# Altium PCB PCB_ModuloIndividualPlaza.PcbDoc
Units mil, origin at the board's own origin, x right, y up, seen from the top; angles counter-clockwise.
Board outline 6000 x 4000 mil, 2 copper layers (Top Layer, Bottom Layer); 76 components, 89 nets, 279 pads, 0 vias.
Unrouted connection lines stored in the file: 158.
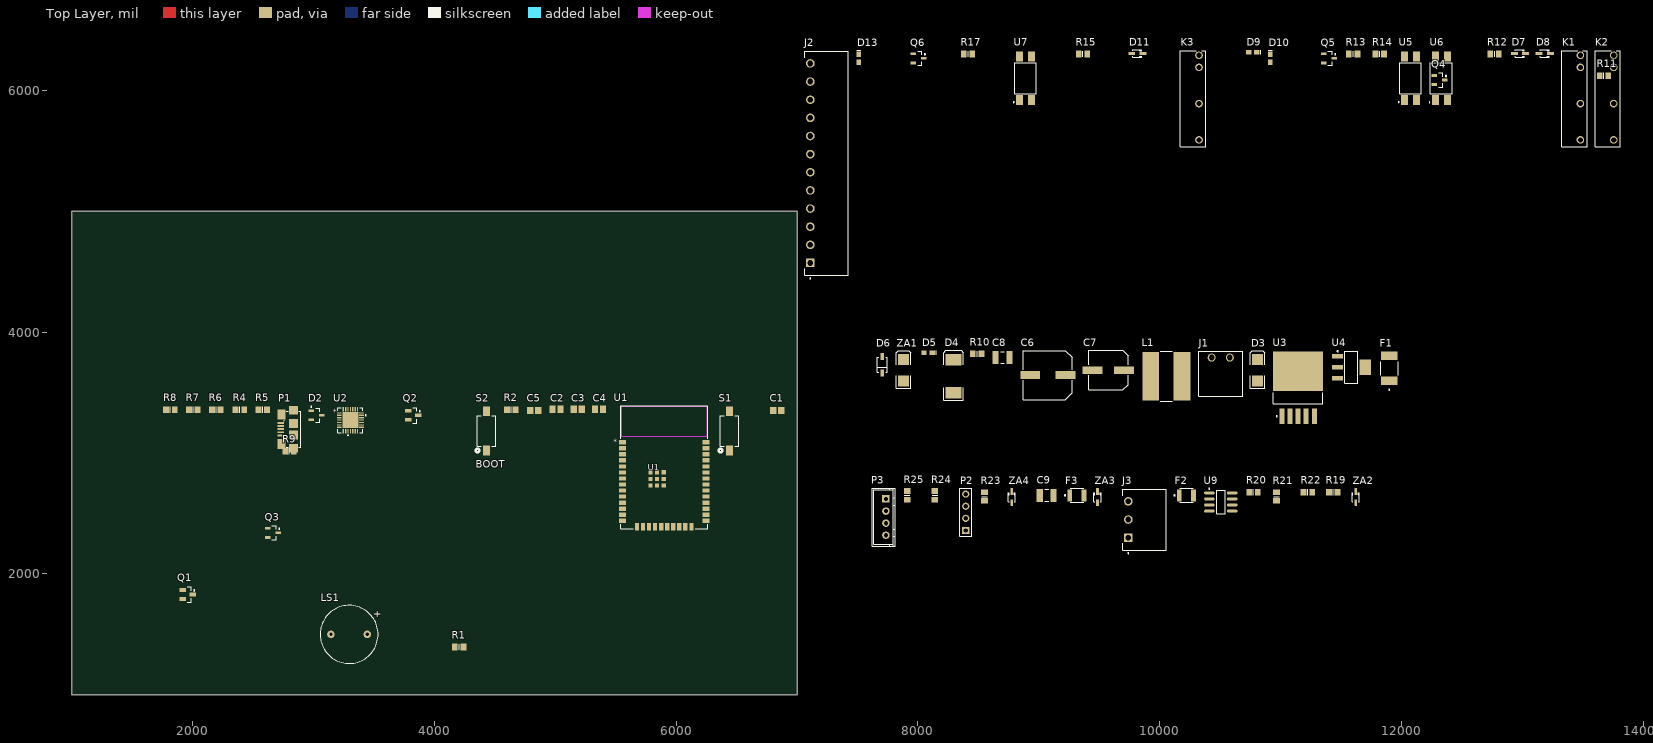
[diagram p0: Top Layer view]
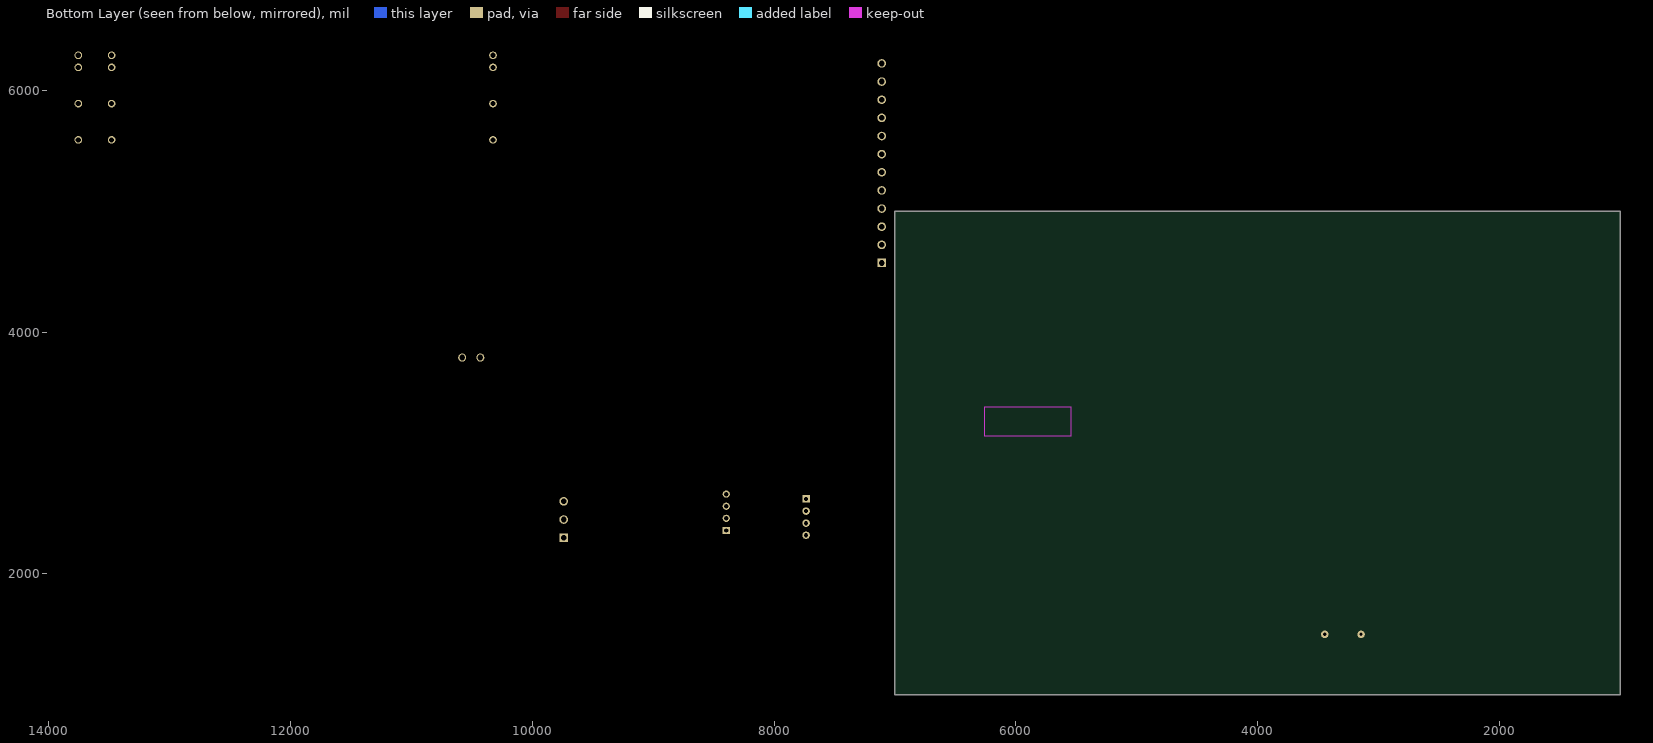
[diagram p1: Bottom Layer view, seen from below]

## Layer stack, top to bottom
Top Solder: solder mask 0.4, Solder Resist, Dk 3.5
Top Layer: signal copper 1.4
Dielectric 1: dielectric 12.6, FR-4, Dk 4.8
Bottom Layer: signal copper 1.4
Bottom Solder: solder mask 0.4, Solder Resist, Dk 3.5

## Board outline
1000,1000 7000,1000 7000,5000 1000,5000

## Design rules (kind name [scope] priority, off if disabled: settings)
Clearance [All] p1: gap=10
PolygonConnect [All] p1: connectstyle=Relief reliefconductorwidth=10 reliefentries=4 polygonreliefangle="90 Angle" airgapwidth=10
RoomDefinition "Salidas con relé" [InComponentClass('Salidas con relé')] p1: confinementstyle=ConfineIn formatcopy=TRUE lockcomponents=FALSE outline 7045,4430 13825,4430 13825,6445 7045,6445
RoomDefinition MainBoard [InComponentClass('MainBoard')] p2: confinementstyle=ConfineIn formatcopy=TRUE lockcomponents=FALSE outline 2660,125 7650,125 7650,1850 2660,1850
RoomDefinition Fuentes [InComponentClass('Fuentes')] p3: confinementstyle=ConfineIn formatcopy=TRUE lockcomponents=FALSE outline 7639.92,3220 11989.92,3220 11989.92,3960 7639.92,3960
RoomDefinition ESP32-WROOM-32E [InComponentClass('ESP32-WROOM-32E')] p4: confinementstyle=ConfineIn formatcopy=TRUE lockcomponents=FALSE outline 1736.26,2342.4 6916.26,2342.4 6916.26,4947.4 1736.26,4947.4
RoomDefinition Comunicaciones [InComponentClass('Comunicaciones')] p5: confinementstyle=ConfineIn formatcopy=TRUE lockcomponents=FALSE outline 7595.51,2155 11775.51,2155 11775.51,2820 7595.51,2820
RoutingVias [All] p1: holewidth=28 width=50 viastyle="Through Hole" minholewidth=28 minwidth=50 maxholewidth=28 maxwidth=50
SolderMaskExpansion [All] p1: expansion=4
Width [All] p1: maxlimit=10 minlimit=10 preferedwidth=10
30 further rules are at their usual default settings.

## Classes and differential pairs
component class Comunicaciones: C9 F2 F3 J3 P2 P3 R19 R20 R21 R22 R23 R24 R25 U9 ZA2 ZA3 ZA4
component class ESP32-WROOM-32E: C1 C2 C3 C4 C5 D2 P1 Q2 Q4 R2 R4 R5 R6 R7 R8 R9 S1 S2 U1 U2
component class Fuentes: C6 C7 C8 D3 D4 D5 D6 F1 J1 L1 R11 U3 U4 ZA1
component class MainBoard: LS1 Q4 R11
component class "Salidas con relé": D7 D8 D9 D10 D11 D13 J2 K1 K2 K3 Q4 Q5 R11 R12 R13 R14 U5 U6 U7

## Components (designator, comment, footprint, x,y, rotation, side; value= is the part's Value field where it differs from the comment)
C1 "100nF" CAPC2012N 6836.26,3352.4 r0 top
C2 "0.1uF" CAPC2012N 5011.26,3362.4 r0 top
C3 "0.1uF" CAPC2012N 5186.26,3362.4 r0 top
C4 "22uF" CAPC2012N 5361.26,3362.4 r0 top
C5 "100nF" CAPC2012N 4826.26,3352.4 r0 top
C6 "470uF" CapElecSMD_10mm 9074.92,3645 r0 top
C7 "330uF" CapElecSMD_8mm 9574.92,3685 r0 top
C8 "10uF" CAPC3225N 8699.92,3790 r0 top
C9 "1uF" CAPC3225N 9065.51,2650 r0 top
D2 "Diode BAT17" SOT-23_N 3026.26,3312.4 r0 top
D3 "RS3JB-13-F" SMB 10809.92,3685 r90 top
D4 "B540C-13-F" SMC 8294.92,3635 r90 top
D5 "APT1608CGCK" CD1608-0603 8084.92,3830 r0 top
D6 "MMSZ5V6T1G" SOD-123_ONS-M 7704.92,3730 r90 top
D7 "1N4448WS" SOD-323 12980,6305 r0 top
D8 "1N4448WS" SOD-323 13185,6305 r0 top
D9 "APT1608CGCK" CD1608-0603 10770,6315 r0 top
D10 "APT1608CGCK" CD1608-0603 10915,6265 r90 top
D11 "1N4448WS" SOD-323 9815,6305 r0 top
D13 "APT1608CGCK" CD1608-0603 7510,6265 r90 top
F1 "PTS18126V300" FUSE_PTS18126_COB 11899.92,3700 r90 top
F2 "MF-USMF050-2" MF-USMF050-2 10220.51,2650 r0 top
F3 "MF-USMF050-2" MF-USMF050-2 9315.51,2650 r0 top
J1 "Bornera_3.81mm_x2" CONN_5444262_PXC 10579.92,3790 r0 top
J2 "Bornera 3.81mm_90º_V_x12" PHOENIX_1803374 7425,4470 r90 top
J3 "Bornera_3.81mm_90_V_x3" Bornera_3.81mm_90_V_x3 9740.51,2300 r90 top
K1 "G6DN-1A DC5" RELAY_G6DN-1A_OMR 13480,6290 r0 top
K2 "G6DN-1A DC5" RELAY_G6DN-1A_OMR 13755,6290 r0 top
K3 "G6DN-1A DC5" RELAY_G6DN-1A_OMR 10325,6290 r0 top
L1 "47uH" INDUCTOR_47UH_3A 10054.92,3635 r0 top
LS1 "Buzzer" BUZZER 3445,1500 r0 top
P1 "Header 5" ZX62-B-5PA(33) 2731.26,3197.4 r90 top
P2 "OLED_STM" HDR1X4 8395.51,2360 r90 top
P3 "CON1X4" CON1X4 7735.51,2320 r90 top
Q1 "S8050 (NPN)" S8050 1960,1830 r0 top
Q2 "S8050 (NPN)" S8050 3826.26,3312.4 r0 top
Q3 "MMBT3904" SOT23_N 2665,2340 r0 top
Q4 "MMBT3904" SOT23_N 12315.08,6085 r0 top
Q5 "MMBT3904" SOT23_N 11400,6265 r0 top
Q6 "MMBT3904" SOT23_N 8005,6265 r0 top
R1 "10MΩ" RESC2012N 4205,1395 r0 top
R2 "10MΩ" RESC2012N 4636.26,3357.4 r0 top
R4 "2KΩ" RESC2012N 2391.26,3357.4 r0 top
R5 "2KΩ" RESC2012N 2581.26,3357.4 r0 top
R6 "22.1KΩ" RESC2012N 2196.26,3357.4 r0 top
R7 "2KΩ" RESC2012N 2006.26,3357.4 r0 top
R8 "47.5KΩ" RESC2012N 1816.26,3357.4 r0 top
R9 "1k" RESC2012N 2801.18,3015 r0 top
R10 "1k" RESC2012N 8489.92,3820 r0 top
R11 "1k" RESC2012N 13675.08,6120 r0 top
R12 "1k" RESC2012N 12770,6300 r0 top
R13 "470" RESC2012N 11600,6300 r0 top
R14 "470" RESC2012N 11820,6300 r0 top
R15 "1k" RESC2012N 9365,6300 r0 top
R17 "470" RESC2012N 8415,6300 r0 top
R19 "100K" RESC2012N 11435.51,2675 r0 top
R20 "10K" RESC2012N 10775.51,2675 r0 top
R21 "10K" RESC2012N 10965.51,2640 r90 top
R22 "10K" RESC2012N 11225.51,2675 r0 top
R23 "100K" RESC2012N 8550.51,2640 r90 top
R24 "4.7k" RESC2012N 8140.51,2650 r90 top
R25 "4.7k" RESC2012N 7910.51,2650 r90 top
S1 "RESET" "SWITCH TACTILE SPST-NO 0.05A 12V" 6441.26,3182.4 r90 top
S2 "BOOT" "SWITCH TACTILE SPST-NO 0.05A 12V" 4431.26,3182.4 r90 top
U1 "ESP32-WROOM-32E" ESP32-WROOM-32E 5901.26,2882.4 r0 top
U2 "CP2102" CP2102 3306.26,3272.4 r0 top
U3 "LM2596S-5.0" TS5B_N 11144.92,3540 r90 top
U4 "TLV1117LV33" SOT223 11584.92,3710 r0 top
U5 "FOD817CSD" "OPTOISOLATOR 5KV TRANSISTOR 4SMD" 12075,6100 r90 top
U6 "FOD817CSD" "OPTOISOLATOR 5KV TRANSISTOR 4SMD" 12330,6100 r90 top
U7 "FOD817CSD" "OPTOISOLATOR 5KV TRANSISTOR 4SMD" 8890,6100 r90 top
U9 "MAX485CSA+T" M08A_N 10505.51,2595 r0 top
ZA1 "P6SMB33CA" SMB 7879.92,3685 r90 top
ZA2 "SD12C-7" SOD-323 11620.51,2635 r90 top
ZA3 "SD12C-7" SOD-323 9485.51,2635 r90 top
ZA4 "SD12C-7" SOD-323 8775.51,2635 r90 top

## Footprints (in the part's own frame and the unit in brackets; to place one, negate y for a bottom-side part, rotate by r counter-clockwise, add the part's x,y. Pads: shape width x height; smd on the part's side, far side on the other; paste and mask are expansions set on the pad)
Bornera_3.81mm_90_V_x3 [mm]
  rect 1.8x1.8 / inner round 1.8 / far side rect 1.8x1.8 hole 1.2: 1(0,0)
  round 1.8 hole 1.2: 2(3.81,0) 3(7.62,0)
  silkscreen extent -3.35,-8 10.22,1.2, body extent -2.61,-8.15 10.21,1.05, height 7.25
BUZZER [mil]
  round 62 hole 28: 1(0,0) 2(-300,0)
  silkscreen extent -390,-240 90,240
CAPC2012N [mm] "Chip Capacitor, Body 2.0x1.3mm, IPC Medium Density"
  rect 1.3x1.5 smd: 1(-0.85,0) 2(0.85,0)
  body extent -1.1,-0.72 1.1,0.72, height 1.1
CAPC3225N [mm] "Chip Capacitor, Body 3.2x2.5mm, IPC Medium Density"
  rect 1.3x2.7 smd: 1(-1.45,0) 2(1.45,0)
  silkscreen extent -0.4,-1.25 0.4,1.25, body extent -1.7,-1.35 1.7,1.35, height 1.35
CapElecSMD_8mm [mm]
  rect 4.2x1.6 smd: 1(3.3,0) 2(-3.3,0)
  silkscreen extent -4.15,-4.15 4.15,4.15, body extent -4.88,-4.12 4.82,4.17, height 10.2
CapElecSMD_10mm [mm]
  rect 4.2x1.6 smd: 1(3.7,0) 2(-3.7,0)
  silkscreen extent -5.15,-5.15 5.15,5.15, body extent -5.4,-5.07 5.6,5.23, height 11.52
CD1608-0603 [mm] "Chip Diode; Body 1.6 x 0.8 mm (LxW typ)"
  rect 1.1x1 smd: 1(-0.85,0) 2(0.85,0)
  silkscreen extent 1.7,-0.4 1.7,0.4
CON1X4 [mil] "Connector; Header; 4 Position"
  rect 62x62 hole 35.43: 1(300,0)
  round 62 hole 35.43: 2(200,0) 3(100,0) 4(0,0)
  silkscreen extent -90,-75 390,115, body extent -95,-93 393,134, height 276
CONN_5444262_PXC [mil]
  round 67 / inner round 60 / far side round 67 hole 47 paste-33.5 mask+0: 1(0,0) 2(-150,0)
  silkscreen extent -258,-320 108,52
CP2102 [mm] "IC USB-TO-UART BRIDGE Interfaz 28-QFN (5x5)"
  rect 0.96x0.255 smd paste+0 mask+0: 1(-2.322,1.5) 2(-2.322,1) 3(-2.322,0.5) 4(-2.322,0) 5(-2.322,-0.5) 6(-2.322,-1) 7(-2.322,-1.5) 15(2.322,-1.5) 16(2.322,-1) 17(2.322,-0.5) 18(2.322,0) 19(2.322,0.5) 20(2.322,1) 21(2.322,1.5)
  rect 0.255x0.96 smd paste+0 mask+0: 8(-1.5,-2.322) 9(-1,-2.322) 10(-0.5,-2.322) 11(0,-2.322) 12(0.5,-2.322) 13(1,-2.322) 14(1.5,-2.322) 22(1.5,2.322) 23(1,2.322) 24(0.5,2.322) 25(0,2.322) 26(-0.5,2.322) 27(-1,2.322) 28(-1.5,2.322)
  rect 3.353x3.353 smd paste-1.676 mask+0: 29(0,0)
  silkscreen extent -2.63,-3.31 3.31,2.63, body extent -2.5,-2.5 2.5,2.5, height 0.99
ESP32-WROOM-32E [mil] "ESP32-WROOM-32E con antena integrada."
  rect 59x35 smd paste+0 mask+0: 1(-344.5,207.1) 2(-344.5,157.1) 3(-344.5,107.1) 4(-344.5,57.1) 5(-344.5,7.1) 6(-344.5,-42.9) 7(-344.5,-92.9) 8(-344.5,-142.9) 9(-344.5,-192.9) 10(-344.5,-242.9) 11(-344.5,-292.9) 12(-344.5,-342.9) 13(-344.5,-392.9) 14(-344.5,-442.9) 25(344.5,-442.9) 26(344.5,-392.9) 27(344.5,-342.9) 28(344.5,-292.9) 29(344.5,-242.9) 30(344.5,-192.9) 31(344.5,-142.9) 32(344.5,-92.9) 33(344.5,-42.9) 34(344.5,7.1) 35(344.5,57.1) 36(344.5,107.1) 37(344.5,157.1) 38(344.5,207.1)
  rect 35x59 smd paste+0 mask+0: 15(-225,-492.15) 16(-175,-492.15) 17(-125,-492.15) 18(-75,-492.15) 19(-25,-492.15) 20(25,-492.15) 21(75,-492.15) 22(125,-492.15) 23(175,-492.15) 24(225,-492.15)
  rect 35x35 smd paste+0 mask+0: 39(-59.1,-96.9) 40(-114.2,-41.8) 41(-114.2,-96.9) 42(-114.2,-152) 43(-59.1,-152) 44(-4,-152) 45(-4,-96.9) 46(-4,-41.8) 47(-59.1,-41.8)
  Keep-Out Layer region: 354.5,258 354.5,502 -354.5,502 -354.5,258
  silkscreen extent -360,-507 360,507, body extent -354,-502 355,502, height 128
FUSE_PTS18126_COB [mil]
  rect 70x138 smd paste+0 mask+0: 1(-102.95,0) 2(102.95,0)
  silkscreen extent -182,-72 55,72, body extent -84,-69 84,69, height 47
HDR1X4 [mm] "Connector; Header; 4 Position"
  rect 1.5x1.5 hole 0.9: 1(0,0)
  round 1.5 hole 0.9: 2(2.54,0) 3(5.08,0) 4(7.62,0)
  silkscreen extent -1.27,-1.27 8.89,1.27
INDUCTOR_47UH_3A [mil] "CIAA_NXP"
  rect 138x402 smd paste+0 mask+0: 1(-130,0) 2(130,0)
  silkscreen extent -50,-208 50,208, body extent -193,-196 193,198, height 236
M08A_N [mm] "SOIC, 8-Leads, Body 4.9x3.9mm, Pitch 1.27mm, IPC Medium Density"
  oval 2.2x0.6 smd: 1(-2.4,1.905) 2(-2.4,0.635) 3(-2.4,-0.635) 4(-2.4,-1.905) 5(2.4,-1.905) 6(2.4,-0.635) 7(2.4,0.635) 8(2.4,1.905)
  silkscreen extent -2.52,-2.5 0.9,2.88, body extent -2,-2.5 2,2.5, height 1.75
MF-USMF050-2 [mm]
  rect 1x2.5 smd paste+0 mask+0: 1(-1.5,0) 2(1.5,0)
  silkscreen extent -2.63,-1.5 1.4,1.5
"OPTOISOLATOR 5KV TRANSISTOR 4SMD" [mm] "FOD817CSD"
  rect 2.09x1.44 smd: 1(-4.54,1.27) 2(-4.54,-1.27) 3(4.54,-1.27) 4(4.54,1.27)
  silkscreen extent -5.1,-2.3 3.25,2.6, body extent -5.08,-2.3 5.08,2.3, height 3.85
PHOENIX_1803374 [mm] "Bornera 3.81mm 90�_V_x12"
  rect 1.8x1.8 / inner round 1.8 / far side rect 1.8x1.8 hole 1.2: 01(2.6,8)
  round 1.8 hole 1.2: 02(6.41,8) 03(10.22,8) 04(14.03,8) 05(17.84,8) 06(21.65,8) 07(25.46,8) 08(29.27,8) 09(33.08,8) 10(36.89,8) 11(40.7,8) 12(44.51,8)
  silkscreen extent -0.75,0 47.11,9.2, body extent 0.02,-0.18 47.13,9.02, height 7.25
RELAY_G6DN-1A_OMR [mil]
  round 63 / inner round 60 / far side round 63 hole 43 paste-31.5 mask+0: 1(0,0) 2(0,-100) 5(0,-400) 8(0,-700)
  silkscreen extent -153,-757 55,39, body extent -142,-758 58,30, height 492
RESC2012N [mm] "Chip Resistor, Body 2.0x1.3mm, IPC Medium Density"
  rect 1.2x1.4 smd: 1(-0.9,0) 2(0.9,0)
  silkscreen extent 0,-0.6 0,0.6, body extent -1.07,-0.7 1.07,0.7, height 0.65
S8050 [mm] "TRANS NPN 25V 0.5A SOT-23"
  rect 1.3x0.8 smd: 1(-1.048,0.95) 2(-1.048,-0.95) 3(1.048,0)
  silkscreen extent -0.1,-1.63 1.48,1.63, body extent -0.7,-1.65 0.7,1.65, height 1.1
SMB [mm] "DO-214-AA/SMB; 2 C-Bend Leads; Body 5.3 x 3.6 mm, inc. leads (LxW)"
  rect 2.3x2.3 smd: 1(-2.25,0) 2(2.25,0)
  silkscreen extent -3.8,-1.55 4.1,1.55
SMC [mm] "DO-214-AB/SMC; 2 C-Bend Leads; Body 7.9 x 5.9 mm, inc. leads (LxW)"
  rect 2.4x3.3 smd: 1(-3.475,0) 2(3.475,0)
  silkscreen extent -5.07,-2.05 5.43,2.05
SOD-123_ONS-M [mil] "MMSZ5V6T1G"
  rect 60x32 smd paste+0 mask+0: 1(-68,0) 2(68,0)
  silkscreen extent -61,-41 61,41
SOD-323 [mm] "SOD-323/SC-76; 2 Leads; Body 1.7 x 1.3 mm, (LxW)"
  rect 1.45x0.55 smd: 1(1.175,0) 2(-1.175,0)
  silkscreen extent -0.95,-0.75 0.95,0.75
SOT23_N [mm] "SOT23, 3-Leads, Body 2.9x1.3mm, Pitch 0.95mm, Lead Span 2.3mm - Reverse Pinning, IPC Medium Density"
  rect 1.15x0.6 smd: 1(1.125,0) 2(-1.125,-0.95) 3(-1.125,0.95)
  silkscreen extent -0.2,-1.5 1.48,1.5, body extent -0.7,-1.5 0.7,1.5, height 1.1
SOT223 [mm] "SOT223, 4-Leads, Body 6.5x3.5mm, Pitch 2.3mm, Lead Span 7mm, IPC Medium Density"
  rect 2.4x1 smd: 1(-2.9,2.3) 2(-2.9,0) 3(-2.9,-2.3)
  rect 2.4x3.3 smd: 4(2.9,0)
  silkscreen extent -3.02,-3.35 1.4,3.47, body extent -1.85,-3.35 1.85,3.35, height 1.8
SOT-23_N [mm] "SOT23, 3-Leads, Body 2.9x1.3mm, Pitch 0.95mm, Lead Span 2.5mm, IPC Medium Density"
  rect 1.15x0.6 smd: 1(-1.125,0.95) 2(-1.125,-0.95) 3(1.125,0)
  silkscreen extent -1.25,-1.5 0.7,1.92, body extent -0.7,-1.5 0.7,1.5, height 1.1
"SWITCH TACTILE SPST-NO 0.05A 12V" [mil] "PTS636 SM50 SMTR LFS"
  rect 79x59 smd paste+0 mask+0: 1(-161.42,0) 2(161.42,0)
  silkscreen extent -176,-78 127,90, body extent -139,-66 141,72, height 169
TS5B_N [mm] "D2-PAK, 6-Leads, Body 8.6x10.2mm, Pitch 1.7mm, Lead Span 14.1mm, IPC Medium Density"
  rect 3.2x1.05 smd: 1(-6,3.4) 2(-6,1.7) 3(-6,0) 4(-6,-1.7) 5(-6,-3.4)
  rect 8.3x10.45 smd: 6(3.45,0)
  silkscreen extent -6.12,-5.2 -1.1,5.2, body extent -3.35,-5.2 6.05,5.2, height 4.65
ZX62-B-5PA(33) [mm] "Micro USB connector"
  rect 0.4x1.35 smd: 1(-1.3,0) 2(-0.65,0) 3(0,0) 4(0.65,0) 5(1.3,0)
  rect 2.1x1.6 smd: 6(-3.1,-0.125) 6(3.1,-0.125)
  rect 1.8x1.9 smd: 7(-4,-2.675) 7(4,-2.675)
  rect 1.9x1.9 smd: 8(-1.2,-2.675) 9(1.2,-2.675)
  silkscreen extent -3.75,-4.13 3.75,-0.67

## Part data
C1 C2 C3 C4 C5: library part Cap, "Capacitor"
C6 C7 C8 C9: library part "Cap Pol3", "Polarized Capacitor (Surface Mount)"
D2: "Silicon RF Schottky Diode for Mixer Applications in the VHF/UHF Range"
D3 D4 D7 D8 D11: library part Diode, "Default Diode"
D5 D9 D10 D13: library part LED2, "LED 1.6x0.8 mm 570 nm GRN CLR SMD"
D6: library part "D Zener", "Zener Diode"
F1: "PTC RESET FUSE 6V 3A 1812"
F2 F3: library part PTS18126V300, "PTC RESET FUSE 6V 3A 1812"
J1: "90º Vert."
J2: "Pluggable Header 3.81mm 16AWG 160V 8A 12 Position COMBICON MC Series"
K1 K2 K3: "Rele_Omron_5V_5A"
L1: library part Inductor, "Inductor"
LS1: "Magnetic Transducer Buzzer"
P1: "Micro USB Connector"
P2 P3: library part MHDR1X4, "Header, 4-Pin"
Q1 Q2: library part S8050
Q3 Q4 Q5 Q6: "NPN Switching Transistor"
R1 R2 R4 R5 R6 R7 R8: library part Res1, "Resistor"
R9 R10 R11 R12 R13 R14 R15 R17 R19 R20 R21 R22 R23: library part Res3, "Resistor"
R24 R25: library part Res2, "Resistor"
S1 S2: library part SW-PB, "Switch"
U3: "SIMPLE SWITCHER® Power Converter 150 KHz 3A Step-Down Voltage Regulator, 5-pin TO-263-5L"
U4: "1-A, Positive Fixed Voltage, Low-Dropout Regulator"
U5 U6 U7: library part Optoisolator1, "4-Pin Phototransistor Optocoupler"
U9: library part DS485MX, "Low-Power RS-485/RS-422 Multipoint Transceiver, 8-pin Narrow SOIC"
ZA1 ZA2 ZA3 ZA4: library part "TVS Diode", "Transient voltage suppressor diode"

## Nets (pads, with @x,y where several pads share a name; then routed paths per layer and width w, separated by ;. In a path a pad name is that pad's centre, name@x,y a point inside that pad or via, vN(x,y) a via of type N, cw(c..) or ccw(c..) an arc to the next point about the centre after c; other vN are vias at no path point)
+3.3V: C2.1 C3.1 C4.1 C8.1 P2.2 R1.2 R2.2 R7.2 R24.2 R25.2 U1.2 U2.6 U2.7 U4.2 U4.4
"+5 V": C7.1 C9.1 D2.3 D6.1 D7.1 D8.1 D11.1 K1.1 K2.1 K3.1 L1.2 LS1.1 P3.1 R10.2 R11.2 R12.2 R15.2 R19.2 R20.2 R21.2 R22.2 U3.4 U4.3 U5.4 U6.4 U7.4 U9.8 ZA2.1
BUZZER: R9.1
COM1: J2.02 K1.5
COM2: J2.04 K3.5
COM3: J2.06 K2.5
COM4: J2.08
COM5: J2.10
COM6: J2.12
D+: P1.3 U2.4
D-: P1.2 U2.5
DTR: Q2.2 R4.2 U2.28
EN: C1.1 Q1.3 R1.1 S1.2 U1.3
GND: C1.2 C2.2 C3.2 C4.2 C5.2 C6.2 C7.2 C8.2 C9.2 D4.1 D5.2 D6.2 J1.1 J3.3 P1.5 P2.1 P3.4 Q3.2 Q4.2 Q5.2 Q6.2 R8.2 R23.1 S1.1 S2.1 U1.1 U1.15 U1.38 U1.39 U1.40 U1.41 U1.42 U1.43 U1.44 U1.45 U1.46 U1.47 U3.3 U3.5 U3.6 U4.1 U9.5 ZA1.2 ZA4.2
IN1: J2.01 K1.8
IN2: J2.03 K3.8
IN3: J2.05 K2.8
IN4: J2.07
IN5: J2.09
IN6: J2.11
IO0: C5.1 Q2.3 R2.1 S2.2 U1.25
NetC6_1: C6.1 F1.2 U3.1 ZA1.1
NetD2_1: D2.1 P1.1 R6.1
NetD3_2: D3.2 J1.2
NetD4_2: D4.2 L1.1 U3.2
NetD5_1: D5.1 R10.1
NetD7_2: D7.2 K1.2 Q4.3
NetD8_2: D8.2 K2.2 Q5.3
NetD9_1: D9.1 U5.2
NetD9_2: D9.2
NetD10_1: D10.1 U6.2
NetD10_2: D10.2
NetD11_2: D11.2 K3.2 Q6.3
NetD13_1: D13.1 U7.2
NetD13_2: D13.2
NetF2_1: F2.1 R23.2 U9.7 ZA3.1 ZA4.1
NetF2_2: F2.2 J3.1
NetF3_1: F3.1 R19.1 U9.6 ZA2.2 ZA3.2
NetF3_2: F3.2 J3.2
NetLS1_2: LS1.2 Q3.3
NetP2_3: P2.3 R24.1
NetP2_4: P2.4 R25.1
NetP3_2: P3.2
NetP3_3: P3.3
NetQ1_1: Q1.1 R4.1
NetQ2_1: Q2.1 R5.2
NetQ3_1: Q3.1 R9.2
NetQ4_1: Q4.1 R13.2
NetQ5_1: Q5.1 R14.2
NetQ6_1: Q6.1 R17.2
NetR7_1: R7.1 U2.9
NetR11_1: R11.1 U5.1
NetR12_1: R12.1 U6.1
NetR13_1: R13.1 U5.3
NetR14_1: R14.1 U6.3
NetR15_1: R15.1 U7.1
NetR17_1: R17.1 U7.3
NetR20_1: R20.1 U9.1
NetR21_1: R21.1 U9.2 U9.3
NetR22_1: R22.1 U9.4
NetU1_4: U1.4
NetU1_5: U1.5
NetU1_6: U1.6
NetU1_7: U1.7
NetU1_8: U1.8
NetU1_9: U1.9
NetU1_10: U1.10
NetU1_11: U1.11
NetU1_12: U1.12
NetU1_13: U1.13
NetU1_14: U1.14
NetU1_16: U1.16
NetU1_23: U1.23
NetU1_24: U1.24
NetU1_26: U1.26
NetU1_27: U1.27
NetU1_28: U1.28
NetU1_29: U1.29
NetU1_30: U1.30
NetU1_31: U1.31
NetU1_33: U1.33
NetU1_36: U1.36
NetU1_37: U1.37
NetU2_3: U2.3 U2.29
RTS: Q1.2 R5.1 U2.24
RXD0: U1.34 U2.26
TXD0: U1.35 U2.25
VBUS: R6.2 R8.1 U2.8
VCC: D3.1 F1.1
pads on no net: D2.2 P1.4 P1.6 P1.7 P1.8 P1.9 U1.17 U1.18 U1.19 U1.20 U1.21 U1.22 U1.32 U2.1 U2.2 U2.10 U2.11 U2.12 U2.13 U2.14 U2.15 U2.16 U2.17 U2.18 U2.19 U2.20 U2.21 U2.22 U2.23 U2.27

## Text inside footprints (layer, text, board x,y; h text height)
LS1: Top Overlay "+" at 3495,1640 h60
U1: Top Overlay "*" at 5481.26,3067.4 h50; Mechanical 13 "*" at 5598.76,3064.5 h50
U2: Top Overlay "*" at 3158.45,3316.3 h50; Mechanical 13 "*" at 3221.26,3316.3 h50